# Altium PCB madiz_plate_v3_02.pcbdoc (part 2 of 2)
Units mil, origin at the board's own origin, x right, y up, seen from the top; angles counter-clockwise.
Board outline 3839.67 x 4045.62 mil, 2 copper layers (Top Layer, Bottom Layer); 68 components, 228 nets, 314 pads, 311 vias.
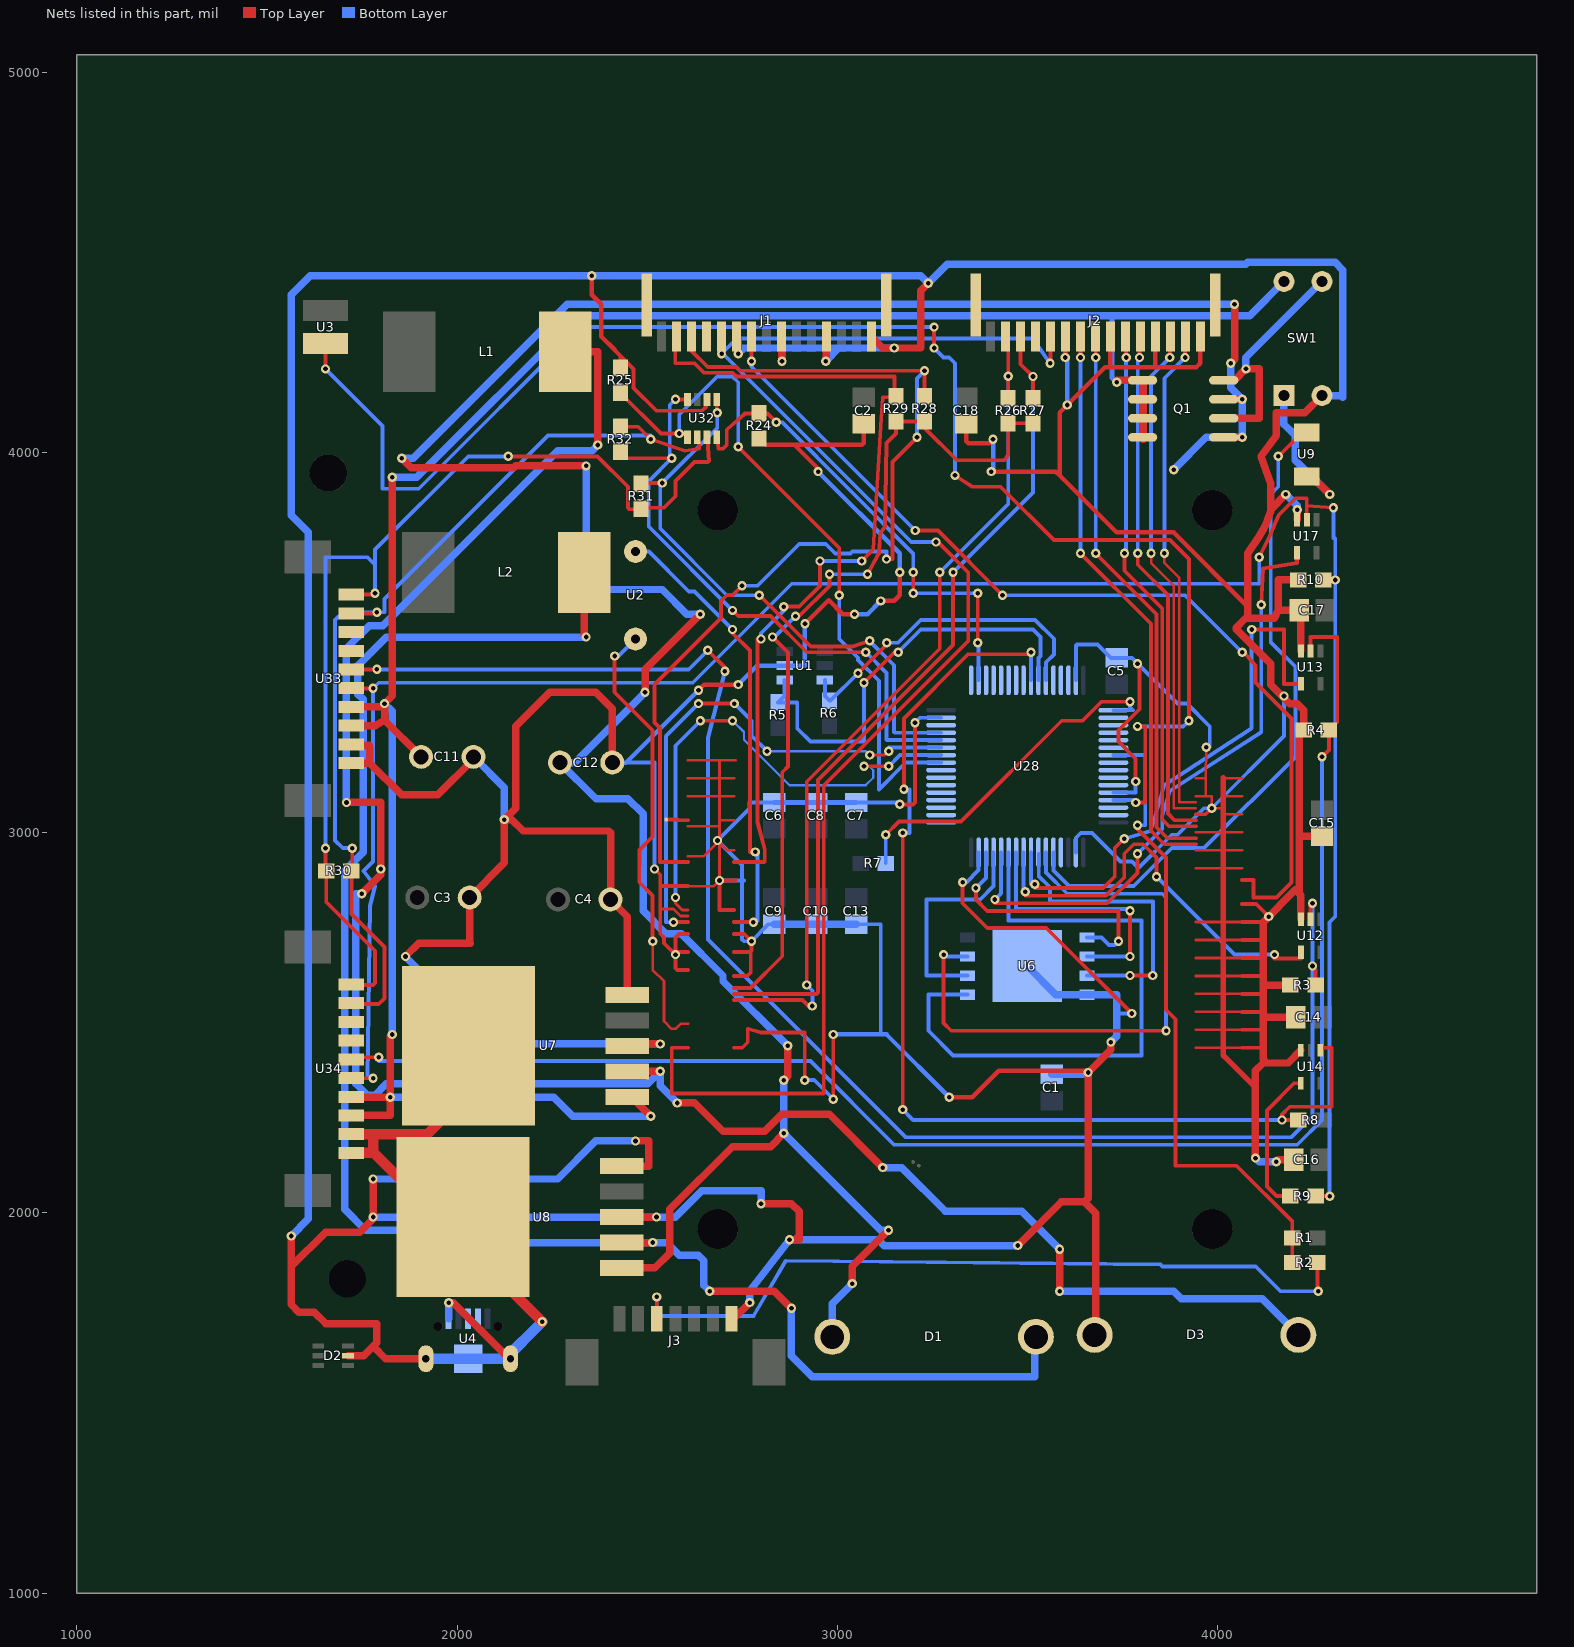
[diagram p2: the nets of this part, all layers, seen from the top]

## Via types
v1: diameter 24.41, hole 12.2, Top Layer to Bottom Layer, tented both sides, 311 vias

## Nets (pads, with @x,y where several pads share a name; then routed paths per layer and width w, separated by ;. In a path a pad name is that pad's centre, name@x,y a point inside that pad or via, vN(x,y) a via of type N, cw(c..) or ccw(c..) an arc to the next point about the centre after c; other vN are vias at no path point) (continued)
J1_9: J1.9 | length 2533.6
  Top Layer w10: v1(2774.44,4239.4) J1.9@2774.44,4304.4 ; v1(3205.03,3794.4) 3264.4,3794.4 v1(3434.4,3624.4) ; 4063.99,2875.27 4094.4,2875.27 4094.4,2829.4 4154.4,2829.4 4194.4,2869.4 4194.4,3300.02 4099.4,3395.02 4099.4,3439.4 4069.4,3474.4 v1(4064.4,3474.4)
  Bottom Layer w10: v1(2774.44,4239.4) 2774.44,4224.99 v1(3205.03,3794.4) ; v1(3434.4,3624.4) 3914.4,3624.4 v1(4064.4,3474.4)
J1_11: J1.11 J2.11 | length 4007
  Top Layer w10: 2607.31,2434.32 2564.4,2434.32 2564.4,2314.4 2964.4,2314.4 2964.4,3123.77 3344.4,3503.77 3344.4,3684.4 3264.4,3764.4 v1(3259.4,3764.4) ; v1(2695.7,4259.4) J1.11@2695.7,4304.4 ; v1(3559.4,4234.4) 3560.7,4235.7 J2.11@3560.7,4304.4
  Bottom Layer w10: v1(3259.4,3764.4) 3194.4,3764.4 2699.4,4259.4 v1(2695.7,4259.4) 2735.7,4299.4 3514.4,4299.4 3524.4,4284.4 v1(3559.4,4234.4)
J1_12: J1.12
J1_13: J1.13 R28.2 | length 2650
  Top Layer w10: 2607.31,2922.51 2533.36,2922.51 2533.36,3275.44 2519.4,3289.4 2519.4,3389.4 2694.4,3564.4 2694.4,3609.4 2709.4,3624.4 2724.4,3624.4 v1(2749.4,3649.4) ; J1.13@2616.96,4304.4 2617,4266.8 2659.4,4224.4 2734.4,4224.4 2744.4,4214.4 3224.4,4214.4 3229.4,4209.4 R28.2@3229.4,4147.4 ; v1(3129.4,3719.4) 3145,3719.4 3145,3975 v1(3209.4,4039.4)
  Bottom Layer w10: v1(2749.4,3649.4) 2790,3649.4 2900,3759.4 2969.4,3759.4 2994.4,3734.4 3034.4,3734.4 3039.4,3739.4 3129.4,3739.4 v1(3129.4,3719.4) ; v1(3209.4,4039.4) 3209.4,4194.4 v1(3229.4,4214.4)
J1_14: J1.14 R29.2 | length 2273.2
  Top Layer w10: J1.14@2573.8,4304.4 2573.8,4234.4 2624.4,4234.4 2649.4,4209.4 2725,4209.4 2735,4199.4 3150.6,4199.4 R29.2@3150.6,4147.4 ; 2728.56,2922.51 2807.51,2922.51 2809.4,2924.4 2809.4,2956.1 2790,3027 2790,3509.4 v1(2799.4,3509.4) ; v1(2859.4,3594.4) 2900,3594.4 2954.4,3648.8 v1(2954.4,3714.4) ; v1(3064.4,3714.4) 3094.4,3744.4 3114.4,4069.4 3119.4,4144.4 R29.2@3154.4,4147.4
  Bottom Layer w10: v1(2799.4,3509.4) 2799.4,3524.4 2859.4,3584.4 v1(2859.4,3594.4) ; v1(2954.4,3714.4) v1(3064.4,3714.4)
J1_G1: J1.G1
J1_G2: J1.G2
J2_2: J2.2 | length 1306.8
  Top Layer w7: v1(3860.03,3734.4) 3860.03,3709.37 3899.4,3670 3899.4,3079.99 3942.74,3079.99
  Top Layer w10: v1(3914.4,4249.4) 3914.4,4303.77 J2.2@3915.03,4304.4
  Bottom Layer w10: v1(3860.03,3734.4) 3860.03,4195.03 v1(3914.4,4249.4)
J2_3: J2.3 | length 1344.1
  Top Layer w7: v1(3825.03,3734.4) 3825.03,3709.37 3884.4,3650 3884.4,3064.24 3942.74,3064.24
  Top Layer w10: v1(3874.4,4249.4) 3874.4,4303.14 J2.3@3875.66,4304.4
  Bottom Layer w10: v1(3825.03,3734.4) 3825.03,4200.03 v1(3874.4,4249.4)
J2_5: J2.5 | length 1370.6
  Top Layer w10: v1(3790.03,3734.4) 3790.03,3704.37 3869.4,3625 3869.4,3050 3886.65,3032.75 3942.74,3032.75 ; v1(3794.4,4249.4) 3794.4,4301.88 J2.5@3796.92,4304.4
  Bottom Layer w10: v1(3790.03,3734.4) 3790.03,4245.03 v1(3794.4,4249.4)
J2_6: J2.6 | length 1411.9
  Top Layer w10: v1(3755.03,3734.4) 3755.03,3688.77 3854.4,3589.4 3854.4,3034.4 3871.8,3017 3942.74,3017 ; J2.6@3757.55,4304.4 3759.4,4302.55 v1(3759.4,4249.4)
  Bottom Layer w10: v1(3755.03,3734.4) 3759.4,3734.4 v1(3759.4,4249.4)
J2_8: J2.8 | length 1471.8
  Top Layer w10: J2.8@3678.81,4304.4 3679.4,4303.81 v1(3679.4,4249.4) ; v1(3679.4,3734.4) 3839.4,3574.4 3839.4,3014.4 3868.3,2985.5 3942.74,2985.5
  Bottom Layer w10: v1(3679.4,3734.4) v1(3679.4,4249.4)
J2_9: J2.9 | length 1509
  Top Layer w10: v1(3639.4,3734.4) 3824.4,3549.4 3824.4,3005 3859.65,2969.75 3942.74,2969.75 ; v1(3639.4,4249.4) J2.9@3639.44,4304.4 J2.9@3639.44,4304.4
  Bottom Layer w10: v1(3639.4,3734.4) v1(3639.4,4249.4)
J2_12: J2.12
J2_13: J2.13 R27.2 | length 2251.7
  Top Layer w10: 2728.56,2576.05 2946.05,2576.05 2949.4,2579.4 2949.4,3138.77 3304.4,3493.77 v1(3304.4,3684.4) ; J2.13@3481.96,4304.4 3481.96,4231.84 v1(3514.4,4199.4) R27.2@3514.4,4142.4
  Bottom Layer w10: v1(3304.4,3684.4) 3514.4,3894.4 v1(3514.4,4199.4)
J2_14: J2.14 R26.2 | length 2260.1
  Top Layer w10: 2728.56,2560.31 2908.49,2560.31 2924.4,2544.4 v1(2934.4,2544.4) ; v1(2919.4,2599.4) 2919.4,3133.8 3269.4,3483.8 v1(3269.4,3684.4) ; J2.14@3442.59,4304.4 3449.4,4297.59 v1(3449.4,4199.87) R26.2@3449.4,4142.4
  Bottom Layer w10: v1(2919.4,2599.4) 2934.4,2584.4 v1(2934.4,2544.4) ; v1(3269.4,3684.4) 3449.4,3864.4 v1@3449.4,4201.46
J2_G1: J2.G1
J2_G2: J2.G2
MOSFET_PIN: U9.2 U28.21 | length 1767.9
  Top Layer w10: v1(4159.4,3989.4) 4222.62,4052.62 U9.2@4234.4,4052.62
  Bottom Layer w10: U28.21@3568.3,2948.03 3568.3,2900.5 3609.4,2859.4 3779.4,2859.4 3879.4,2959.4 3964.4,2959.4 4204.4,3199.4 4204.4,3436.4 4139.4,3501.4 4139.4,3889.4 4159.4,3909.4 v1(4159.4,3989.4)
POWER+: C11.1 Q1.5 Q1.6 Q1.7 Q1.8 SW1.4 U7.1 U33.7 U33.8 U34.7 U34.8 | length 6226.8
  Top Layer w19.68: U34.8@1721.48,2256.37 1824.4,2256.4 v1(1824.4,2304.4) ; U34.7@1721.48,2305.58 1721.5,2304.4 v1(1824.4,2304.4) ; U33.8@1721.48,3281.37 1784.4,3281.37 1809.4,3295.49 ; U33.7@1721.48,3330.58 1800.58,3330.58 v1(1809.4,3339.4) ; 1825.03,2374.4 1824.4,2373.77 v1(1824.4,2304.4) ; v1(1829.4,2469.4) 1824.4,2464.4 v1(1824.4,2304.4) ; 1829.4,3414.4 v1(1829.4,3934.4) 1829.4,3914.4 ; 1829.4,3534.4 1829.4,3359.4 v1(1809.4,3339.4) ; C11.1@1905.5,3199.4 1809.4,3295.49 ; U7.1@2448.16,2305.4 2458.4,2305.4 v1(2509.4,2254.4) ; v1(3734.4,4184.4) 3734.4,4189.4 Q1.5@3802.9,4189.4 ; Q1.8@3804.4,4034.4 Q1.7@3804.4,4084.4 ; Q1.7@3804.4,4089.4 3804.4,4139.4 Q1.5@3804.4,4189.4 ; 1809.4,3295.49 v1(1809.4,3339.4)
  Bottom Layer w13.78: 3722.25,4359.4 3722.25,4196.55 v1(3734.4,4184.4)
  Bottom Layer w19.68: v1(1809.4,3339.4) 1829.4,3319.4 v1(1829.4,2469.4) ; v1(1824.4,2304.4) 2254.4,2304.4 2304.4,2254.4 v1(2509.4,2254.4) ; v1(1829.4,3934.4) 1894.4,3934.4 2319.4,4359.4 4084.4,4359.4 SW1.4@4174.4,4449.4
POWER-: C1.2 C2.1 C3.2 C4.2 C5.2 C6.2 C7.2 C8.2 C9.2 C10.2 C11.2 C12.2 C13.2 C14.1 C15.1 C16.1 C17.2 C18.1 D2.2 D3.2 J1.1 J1.4 J1.7 J1.10 J2.1 J2.4 J2.7 J2.10 J3.7 pad.10 R3.2 R4.2 R10.1 R24.1 R25.1 SW1.2 U1.2 U4.5 U4.6 U4.7 U6.4 U6.9 U7.3 U7.5 U7.6 U8.3 U8.5 U8.6 U12.3 U13.3 U14.3 U17.3 U28.12 U28.18 U28.31 U28.47 U28.63 U32.2 U33.9 U33.10 U34.9 U34.10 | length 38405.4
  Top Layer w7: 2534.4,2799.2 2569.2,2799.2 2587.62,2780.78 2607.31,2780.78 ; 2607.31,2859.52 2675.15,2859.52 v1(2690.03,2874.4) 2690.03,2974.4 v1(2685.03,2979.4) 2685.03,2974.4 2648.89,2938.26 2607.31,2938.26 ; 2607.31,3017 2690,3017 ; 2607.31,3095.74 2690,3095.74 2728.56,3095.74 ; 2607.31,3142.98 2690,3142.98 2728.56,3142.98 ; 2607.31,3190.23 2690,3190.23 ; 2690,3032.75 2728.56,3032.75 ; 2728.56,2954.01 2710.39,2954.01 v1(2685.03,2979.4) 2690,2984.4 2690,3190.2 2732.3,3190.2 ; 3942.74,2434.32 4015.02,2434.32 ; 3942.74,2481.57 4015.02,2481.57 ; 3942.74,2528.81 4015.02,2528.81 ; 3942.74,2576.05 4015.02,2576.05 ; 3942.74,2623.3 4015.02,2623.3 ; 3942.74,2670.54 4015.02,2670.54 ; 3942.74,2717.79 4015.02,2717.79 ; 3942.74,2765.03 4015.02,2765.03 ; 3942.74,2906.76 4015.02,2906.76 ; 3942.74,2954.01 4015.02,2954.01 ; 3942.74,3001.25 4014.75,3001.25 4015,3001.5 4015.25,3001.25 4063.99,3001.25 ; 3942.74,3095.74 3968.6,3095.74 3968.6,3143 ; 3942.74,3142.98 3968.58,3142.98 ; 3968.6,3095.7 3984.4,3095.7 v1(3984.4,3064.4) 4015.03,3064.4 4015.03,3065.97 ; v1(3970.03,3224.4) 3968.6,3143 ; 4015,3049 4015.51,3048.49 4063.99,3048.49 ; 4015,3096.5 4015.76,3095.74 4063.99,3095.74 ; 4063.99,2434.32 4015.02,2434.32 ; 4063.99,2481.57 4015.02,2481.57 ; 4063.99,2528.81 4015.02,2528.81 ; 4063.99,2576.05 4015.02,2576.05 ; 4063.99,2623.3 4015.02,2623.3 ; 4063.99,2670.54 4015.02,2670.54 ; 4063.99,2717.79 4015.02,2717.79 ; 4063.99,2765.03 4015.02,2765.03 ; 4063.99,2906.76 4015.02,2906.76 ; 4063.99,2954.01 4015.02,2954.01 ; 4063.99,3142.98 4020.02,3142.98 4020.02,3144.4 4015.02,3144.4 4015.02,2979.4 4015.02,2954.01 ; 4015.02,2434.32 4015.02,2481.57 ; 4015.02,2481.57 4015.02,2528.81 ; 4015.02,2528.81 4015.02,2579.24 4015.02,2576.05 ; 4015.02,2576.05 4015.02,2623.3 ; 4015.02,2623.3 4015.02,2670.54 ; 4015.02,2670.54 4015.02,2717.79 ; 4015.02,2717.79 4015.02,2765.03 ; 4015.02,2765.03 4015.02,2906.76 ; 4015.02,2906.76 4015.02,2954.01
  Top Layer w10: R25.1@2429.4,4222.4 2429.4,4254.4 2414.4,4269.4 2464.4,4219.4 2464.4,4169.4 2524.4,4109.4 2644.4,4109.4 2654.4,4119.4 2654.4,4136.2 U32.2@2657.19,4139.01 ; v1(2519.4,2904.4) 2534.4,2889.4 2534.4,2859.4 ; 2607.31,2639.05 2579.75,2639.05 2574.4,2644.4 v1(2574.4,2679.4) ; 2607.31,2686.29 2581.29,2686.29 v1(2574.4,2679.4) ; 2607.31,2733.53 2583.53,2733.53 2574.4,2724.4 v1(2574.4,2679.4) ; 2607.31,2859.52 2607.19,2859.4 2534.4,2859.4 ; 2728.56,2434.32 2749.94,2434.32 2764.4,2448.77 2764.4,2484.4 2799.4,2474.4 2914.4,2474.4 v1(2914.4,2349.4) ; 2728.56,2623.3 2763.3,2623.3 2772.51,2632.51 2772.51,2686.29 ; 2728.56,2686.29 2771.29,2686.29 2774.4,2689.4 v1(2774.4,2714.4) 2755.27,2733.53 2728.56,2733.53 ; 2728.56,2796.53 2690.03,2796.53 v1(2690.03,2874.4) 2732.3,2874.4 2732.3,2875.3 ; v1(2989.4,2299.4) v1(2989.4,2469.4) ; v1(3164.4,3074.4) 3199.4,3074.4 3204.4,3079.4 v1(3204.4,3289.4) ; v1(3329.4,2869.4) 3329.4,2814.4 3394.4,2749.4 3549.4,2749.4 v1(3774.4,2524.4) ; v1(3784.4,3134.4) 3784.4,3194.4 3739.4,3239.4 3739.4,3269.4 3794.4,3324.4 3794.4,3444.4 v1(3789.4,3444.4) ; 3942.74,3048.49 3968.49,3048.49 v1(3984.4,3064.4) ; 4063.99,2434.32 4118.11,2434.32 4119.4,2435.6 ; 4063.99,2481.57 4119.4,2481.57 ; 4063.99,2528.81 4118.31,2528.81 4119.4,2529.9 ; 4063.99,2576.05 4119.4,2576.05 ; 4063.99,2623.3 4119.4,2623.3 ; 4063.99,2670.54 4119.4,2670.54 ; 4063.99,2717.79 4119.4,2717.79 ; 4063.99,2765.03 4120.03,2765.03 v1(4134.4,2779.4) 4101.53,2812.27 4063.99,2812.27 ; v1@4163.66,3359.4 v1(4174.4,3359.4) ; 2534.4,2859.4 2534.4,2734.4 2544.4,2724.4 2544.4,2709.4 v1(2574.4,2679.4)
  Top Layer w11.81: v1(2354.4,4464.4) 2354.4,4414.4 2379.4,4389.4 2379.4,4304.4 2414.4,4269.4 ; v1(2635.03,3374.4) 2650.03,3389.4 v1(2739.4,3389.4) ; R24.1@2794.4,4036.4 2811.4,4019.4 3064.4,4019.4 3069.4,4024.4 C2.1@3069.4,4075.46 ; 2887.55,4019.4 2949.4,3957.55 v1(2949.4,3949.4) ; v1(2915.03,3549.4) 2977.21,3611.58 3014.4,3574.4 v1(3045.03,3574.4) ; v1(3114.4,3609.4) 3149.4,3609.4 3164.4,3624.4 v1(3164.4,3684.4) ; v1(3294.4,2304.4) 3354.4,2304.4 3424.4,2374.4 3654.4,2374.4 v1(3659.4,2369.4) ; C18.1@3339.4,4075.46 3339.4,4029.4 3344.4,4024.4 3399.4,4024.4 v1(3409.4,4034.4) ; v1(3404.4,3949.4) 3574.4,3949.4 3584.4,3939.4 ; v1(3599.4,4249.4) 3599.4,4303.73 J2.10@3600.07,4304.4 ; 3717.7,4224.4 J2.7@3718.18,4304.4 ; J2.4@3836.29,4304.4 3836.29,4227.51 3839.4,4224.4 ; J2.1@3954.4,4304.4 3954.4,4234.4 3944.4,4224.4 3839.4,4224.4 ; 4079.4,3564.4 4079.4,3594.4 3884.4,3789.4 3734.4,3789.4 3584.4,3939.4 ; 3584.4,3939.4 3584.4,4104.4 v1(3604.4,4124.4) 3704.4,4224.4 3839.4,4224.4
  Top Layer w15: 4015.03,3144.4 4015.03,2414 4099.4,2329.63
  Top Layer w19.68: v1(1564.4,1939.4) 1564.4,1859.4 ; D2.2@1713.38,1624.4 1754.4,1624.4 1779.4,1649.4 ; U33.10@1721.48,3182.95 1770.9,3182.9 1854.4,3099.4 1949.4,3099.4 2043.3,3193.3 C11.2@2043.3,3199.4 ; U33.9@1721.48,3232.16 1724.24,3229.4 1769.4,3229.4 1770.85,3220.85 1770.85,3182.95 ; v1(1779.4,2089.4) v1(1779.4,1989.4) 1779.4,1984.4 1744.4,1949.4 1654.4,1949.4 1564.4,1859.4 ; v1(1864.4,2674.4) 1899.4,2709.4 2034.4,2709.4 2033.3,2710.5 C3.2@2033.3,2829.4 2124.4,2920.49 v1(2124.4,3034.4) ; U4.6@1918.22,1616.76 1812.04,1616.76 1779.4,1649.4 ; v1(1978.21,1763.63) 1990.17,1763.63 2137.06,1616.74 U4.7@2140.62,1616.74 ; C12.2@2408.3,3184.4 2408.3,3325.5 2364.4,3369.4 2244.4,3369.4 2154.4,3279.4 2154.4,3064.4 v1(2124.4,3034.4) ; U8.3@2433.16,1989.4 v1(2524.4,1989.4) ; U8.5@2433.16,2123.4 2504.4,2123.4 2504.4,2189.4 v1(2469.4,2189.4) ; U7.3@2448.16,2439.4 2453.16,2444.4 v1(2534.4,2444.4) ; U7.5@2448.16,2573.4 2448.16,2779.53 C4.2@2403.3,2824.4 2404.4,2825.49 2404.4,2999.4 2399.4,3004.4 2174.4,3004.4 2144.4,3034.4 v1(2124.4,3034.4) ; J3.7@2722.04,1721.48 2726.48,1721.48 v1(2769.4,1764.4) ; J1.10@2735.07,4304.4 2739.4,4300.07 v1(2739.4,4259.4) ; v1(2799.4,2024.4) 2879.4,2024.4 2899.4,2004.4 2899.4,1934.4 ; J1.7@2853.18,4304.4 2854.4,4303.18 v1(2854.4,4239.4) ; v1(2874.4,1929.4) 2899.4,1929.4 2899.4,1934.4 ; v1(2969.4,4239.4) 2971.29,4241.29 J1.4@2971.29,4304.4 ; J1.1@3089.4,4304.4 3119.4,4274.4 v1(3149.4,4274.4) 3219.4,4274.4 3219.4,4424.4 v1(3239.4,4444.4) ; v1(3474.4,1914.4) 3589.4,2029.4 3649.4,2029.4 ; D3.2@3676.68,1679.4 3679.4,1682.14 3679.4,1999.4 3649.4,2029.4 ; v1(3719.4,2449.4) 3719.4,2429.4 v1(3659.4,2369.4) 3659.4,2039.4 3649.4,2029.4 ; v1(4099.4,2144.4) 4099.4,2374.4 4119.4,2394.4 4129.4,2394.4 ; 4119.4,2599.4 R3.2@4191.4,2599.4 ; v1(4154.4,2134.4) 4159.4,2139.4 C16.1@4200.46,2139.4 ; v1(4179.4,3889.4) 4139.4,3849.4 4139.4,3844.4 ; 4204.4,2849.4 4119.4,2764.4 4119.4,2509.4 ; C14.1@4205.46,2514.4 4124.4,2514.4 4119.4,2509.4 ; U17.3@4208.81,3822.71 4208.81,3848.81 v1(4209.4,3849.4) ; R10.1@4211.4,3664.4 4159.4,3664.4 4159.4,3584.4 ; U14.3@4218.81,2427.7 4185.5,2394.4 4129.4,2394.4 ; U12.3@4218.81,2772.71 4218.8,2835 4214.4,2839.4 4214.4,2984.4 ; U13.3@4218.81,3477.71 4218.81,3580.03 C17.2@4214.44,3584.4 4169.4,3584.4 4159.4,3584.4 ; C15.1@4274.4,2990.46 4220.46,2990.46 4214.4,2984.4 ; SW1.2@4274.4,4149.4 4229.4,4104.4 4154.4,4104.4 4154.4,4044.4 4114.4,3989.4 4139.4,3919.4 4139.4,3864.4 4139.4,3844.4 ; 1564.4,1859.4 1564.4,1759.4 1584.4,1739.4 1624.4,1739.4 1654.4,1709.4 1789.4,1709.4 1789.4,1659.4 1779.4,1649.4 ; 2899.4,1934.4 2894.4,1934.4 2899.4,1934.4 ; 4079.4,3564.4 4074.4,3564.4 4049.4,3539.4 4049.4,3534.4 4139.4,3444.4 4139.4,3389.4 4189.4,3339.4 4209.4,3339.4 4226.4,3322.4 R4.2@4226.4,3269.4 4214.4,3257.4 4214.4,2984.4 ; 4079.4,3564.4 4079.4,3734.4 4109.4,3779.4 4124.4,3804.4 4139.4,3844.4 ; 4079.4,3564.4 4149.4,3564.4 4159.4,3584.4 ; 4119.4,2509.4 4119.4,2404.4 4129.4,2394.4
  Top Layer w27.56: U34.10@1721.48,2157.95 1777.95,2157.95 1779.4,2159.4 ; U34.9@1721.48,2207.16 1779.4,2207.16 ; U7.6@2030.64,2439.4 2030.64,2315.64 1922.16,2207.16 1779.4,2207.16 ; v1(2224.4,1714.4) 2015.64,1923.16 U8.6@2015.64,1989.4 1949.4,1989.4 1779.4,2159.4 ; 1779.4,2159.4 1779.4,2207.16
  Bottom Layer w10: C12.2@2408.3,3184.4 2519.4,3184.4 v1(2519.4,2904.4) ; v1(2690.03,2874.4) 2754.42,2874.4 2755.02,2875 ; C9.2@2834.4,2759.44 2819.44,2759.44 v1(2774.4,2714.4) 2754.4,2714.4 2749.4,2719.4 2749.4,2915.03 v1(2685.03,2979.4) 2769.4,3063.77 2769.4,3079.4 C6.2@2834.4,3079.36 ; v1(2914.4,2349.4) 2939.4,2349.4 v1(2989.4,2299.4) ; v1(2989.4,2469.4) 3114.4,2469.4 3114.4,2759.4 C13.2@3049.4,2759.44 ; C7.2@3049.4,3079.36 3159.44,3079.36 v1(3164.4,3074.4) ; v1(3204.4,3289.4) 3217.35,3302.35 U28.47@3273.03,3302.35 ; v1(3329.4,2869.4) 3339.4,2869.4 3371.5,2901.5 U28.31@3371.5,2948 ; U28.18@3627.35,2948.03 3627.3,2986.7 3640,2999.4 3669.4,2999.4 3744.4,2924.4 3774.4,2924.4 3789.4,2909.4 3794.4,2909.4 3879.4,2994.4 3894.4,2994.4 3964.4,3064.4 v1(3984.4,3064.4) 4174.4,3254.4 v1(4174.4,3359.4) ; U28.63@3627.35,3400.77 3627.35,3492.35 3629.4,3494.4 3684.4,3494.4 3719.44,3459.36 C5.2@3734.4,3459.36 3774.44,3459.36 v1(3789.4,3444.4) 3894.4,3339.4 3919.4,3339.4 3979.4,3279.4 3979.4,3224.4 v1(3970.03,3224.4) ; U28.12@3725.77,3105.5 3784.4,3105.5 v1(3784.4,3134.4) ; 3734.4,2524.4 v1(3774.4,2524.4)
  Bottom Layer w11.81: C12.2@2408.3,3184.4 2445.02,3184.39 v1(2635.03,3374.4) ; v1(2739.4,3389.4) 2789.4,3439.4 U1.2@2861.25,3439.4 2914.4,3439.4 2914.4,3548.77 v1(2915.03,3549.4) ; v1(2949.4,3949.4) 3164.4,3734.4 v1(3164.4,3684.4) ; v1(2989.4,2469.4) 3129.4,2469.4 v1(3294.4,2304.4) ; v1(3045.03,3574.4) 3079.4,3574.4 v1(3114.4,3609.4) ; v1(3404.4,3949.4) 3409.4,3954.4 v1(3409.4,4034.4) ; v1(3599.4,4249.4) 3604.4,4244.4 v1(3604.4,4124.4)
  Bottom Layer w13.78: C6.2@2834.4,3079.36 C8.2@2944.4,3079.36 C7.2@3049.4,3079.36
  Bottom Layer w19.68: v1(1564.4,1939.4) 1609.4,1984.4 1609.4,3789.4 1564.4,3834.4 1564.4,4414.4 1614.4,4464.4 3219.4,4464.4 v1(3239.4,4444.4) 3289.4,4494.4 4074.4,4494.4 4079.4,4499.4 4309.4,4499.4 4329.4,4479.4 4329.4,4144.4 4324.41,4149.39 SW1.2@4274.4,4149.4 ; v1(1779.4,1989.4) v1(2524.4,1989.4) 2574.4,1989.4 2579.4,1994.4 2643.66,2058.66 2799.4,2058.66 v1(2799.4,2024.4) ; v1(1779.4,2089.4) 2264.4,2089.4 2364.4,2189.4 v1(2469.4,2189.4) ; v1(1864.4,2674.4) 2094.4,2444.4 v1(2534.4,2444.4) ; U4.5@1978.21,1722.06 v1(1978.21,1763.63) ; C11.2@2043.3,3199.4 2124.4,3118.29 v1(2124.4,3034.4) ; v1(2739.4,4259.4) 2749.4,4269.4 2749.4,4274.4 v1(3149.4,4274.4) 3004.4,4274.4 v1(2969.4,4239.4) ; v1(2769.4,1764.4) 2769.4,1794.4 v1(2874.4,1929.4) 3064.4,1929.4 3108.48,1929.4 3123.48,1914.4 v1(3474.4,1914.4) ; C9.2@2834.4,2759.44 C10.2@2944.4,2759.44 C13.2@3049.4,2759.44 ; 2853.6,4274.4 v1(2854.4,4239.4) ; U6.9@3499.4,2649.4 3574.4,2574.4 U6.4@3656.88,2574.4 3734.4,2574.4 3734.4,2464.4 v1(3719.4,2449.4) ; C1.2@3564.4,2364.36 3654.36,2364.36 v1(3659.4,2369.4) ; v1(4099.4,2144.4) 4109.4,2134.4 v1(4154.4,2134.4) ; v1(4179.4,3889.4) 4209.4,3859.4 v1(4209.4,3849.4)
  Bottom Layer w27.56: U4.6@1918.22,1616.76 U4.7@2029.4,1616.74 ; U4.7@2029.4,1616.74 2140.62,1616.74 2140.62,1630.62 pad.10@2208.82,1698.82 v1(2224.4,1714.4)
Q1_1: C12.1 D1.2 Q1.1 Q1.3 U8.1 | length 7413.3
  Top Layer w19.68: v1(1854.4,3984.4) 1879.4,3959.4 1889.4,3959.4 2149.14,3959.4 2154.14,3964.4 v1(2339.4,3964.4) ; U8.1@2433.16,1855.4 2520.4,1855.4 2559.4,1894.4 2559.4,2009.4 2724.4,2174.4 2824.4,2174.4 v1(2859.4,2209.4) ; v1(2494.4,3369.4) 2494.4,3429.4 v1(2639.4,3574.4) ; v1(2859.4,2349.4) 2869.4,2359.4 v1(2869.4,2439.4) ; v1(3039.4,1814.4) 3039.4,1859.4 v1(3134.4,1954.4) ; Q1.1@4015.9,4039.4 v1(4064.4,4039.4) ; Q1.3@4015.9,4139.4 v1(4064.4,4139.4) ; v1(4034.4,4234.4) 4044.4,4244.4 v1(4044.4,4389.4)
  Bottom Layer w19.68: v1(1854.4,3984.4) 1884.4,3984.4 2289.4,4389.4 v1(4044.4,4389.4) ; v1(2339.4,3964.4) 2339.4,3639.4 2539.4,3639.4 2604.4,3574.4 v1(2639.4,3574.4) ; v1(2494.4,3369.4) 2309.39,3184.39 C12.1@2270.5,3184.4 2365.5,3089.4 2449.4,3089.4 2489.4,3049.4 2489.4,2794.4 2549.4,2734.4 2589.4,2734.4 2699.4,2624.4 2699.4,2609.4 v1(2869.4,2439.4) ; v1(2859.4,2349.4) v1(2859.4,2209.4) 3114.4,1954.4 v1(3134.4,1954.4) ; D1.2@2986.68,1674.4 2986.67,1761.67 v1(3039.4,1814.4) ; v1(3884.4,3954.4) 3969.4,4039.4 v1(4064.4,4039.4) v1(4064.4,4139.4) 4034.4,4169.4 v1(4034.4,4234.4)
R1_1: R1.1 R2.2 U28.7 | length 1700.4
  Top Layer w10: v1(3789.4,3019.4) 3789.4,3010 3864.4,2935 3864.4,2534.4 3889.4,2509.4 3889.4,2124.4 4049.4,2124.4 4196.4,1977.4 R1.1@4196.4,1934.4 R2.2@4196.4,1869.4
  Bottom Layer w10: U28.7@3725.77,3203.93 3809.4,3203.9 3809.4,3019.4 v1(3789.4,3019.4)
R2_1: J3.3 R2.1 | length 2035.1
  Top Layer w10: J3.3@2525.19,1721.48 v1(2525.19,1779.4) ; R2.1@4262.4,1869.4 4262.4,1796.4 v1(4264.4,1794.4)
  Bottom Layer w10: v1(2525.19,1779.4) 2525.2,1729.4 2779.4,1729.4 2864.4,1874.4 3849.4,1864.4 3854.4,1859.4 4100,1859.4 4165,1794.4 v1(4264.4,1794.4)
R3_1: R3.1 U12.2 U33.5 | length 4267.4
  Top Layer w10: U33.5@1721.48,3429.01 1721.87,3429.4 v1(1789.4,3429.4) ; v1(2659.4,3479.4) 2704.4,3434.4 v1(2704.4,3424.4) ; U12.2@4244.4,2772.71 4244.4,2809.4 v1(4249.4,2814.4) ; v1(4249.4,2649.4) 4249.4,2646.83 4257.4,2638.83 ; 4257.4,2638.83 R3.1@4257.4,2599.4 4257.4,2638.83
  Bottom Layer w10: v1(1789.4,3429.4) 2609.4,3429.4 v1(2659.4,3479.4) ; v1(2704.4,3424.4) 2660,3249.4 2660,2718.8 3179.4,2199.4 4194.4,2199.4 4249.4,2254.4 v1(4249.4,2814.4)
R4_1: R4.1 U13.2 U34.5 | length 4076.5
  Top Layer w10: U34.5@1721.48,2404.01 1726.87,2409.4 v1(1794.4,2409.4) ; U13.2@4244.4,3477.71 4244.4,3514.4 4314.4,3514.4 4314.4,3291.4 R4.1@4292.4,3269.4 4292.4,3217.4 v1(4274.4,3199.4)
  Bottom Layer w10: v1(1794.4,2409.4) 1794.4,2399.4 2929.4,2399.4 3149.4,2179.4 4209.4,2179.4 4274.4,2244.4 v1(4274.4,3199.4)
R8_2: R8.2 U14.1 U28.57 | length 2941.9
  Top Layer w10: v1(3171.9,2271.9) v1(3171.9,2999.4) ; v1(3175.03,3114.4) 3175,3300 3344.4,3469.4 3509.4,3469.4 v1(3509.4,3474.4) ; R8.2@4211.4,2244.4 v1(4169.4,2244.4) 4169.4,2259.4 4189.4,2279.4 4299.4,2279.4 4299.4,2434.4 4270,2434.4 U14.1@4269.99,2427.7
  Bottom Layer w10: v1@3169.4,2274.4 3199.4,2244.4 v1(4169.4,2244.4) ; v1(3171.9,2999.4) 3189.4,2999.4 3189.4,3114.4 v1(3175.03,3114.4) ; U28.57@3509.24,3400.77 v1(3509.4,3474.4)
R9_1: R9.1 R10.2 U17.2 U33.6 U34.6 | length 5962.9
  Top Layer w10: U34.6@1721.48,2354.8 1721.88,2354.4 v1(1779.4,2354.4) ; U33.6@1721.48,3379.8 1721.88,3379.4 v1(1779.4,3379.4) ; v1(4109.4,3724.4) 4134.4,3774.4 4160.6,3835.6 4204.4,3879.4 4234.4,3879.4 U17.2@4234.4,3822.71 4234.4,3859.4 v1(4304.4,3854.4) ; R9.1@4257.4,2044.4 v1(4294.4,2044.4) ; R10.2@4277.4,3664.4 v1(4309.4,3664.4)
  Bottom Layer w10: v1@1774.4,3376.9 1779.4,3376.9 1779.4,2924.4 1754.4,2899.4 1784.4,2859.4 1771,2807.6 1764.4,2354.4 v1(1779.4,2354.4) ; v1(1779.4,3379.4) 1794.4,3394.4 2620,3394.4 2880,3654.4 4109.4,3654.4 v1(4109.4,3724.4) ; v1(4294.4,2044.4) 4294.4,2764.4 4309.4,2779.4 4309.4,3774.4 4304.4,3774.4 v1(4304.4,3854.4)
R9_2: R9.2 U14.4 | length 391.5
  Top Layer w10: R9.2@4191.4,2044.4 4154.4,2044.4 4129.4,2069.4 4129.4,2269.4 4201.1,2341.1 U14.4@4218.81,2341.09
R24_2: R24.2 U28.50 U32.8 | length 1270.2
  Top Layer w10: U32.8@2682.8,4049.8 2687.8,4009.4 2699.4,4009.4 2709.4,4019.4 2709.4,4059.4 2754.4,4099.4 2756.4,4102.4 R24.2@2794.4,4102.4 2816.4,4102.4 v1(2839.4,4079.4) ; v1(3199.4,3629.4) v1(3199.4,3684.4) ; v1(3369.4,3499.4) v1(3369.4,3629.4)
  Bottom Layer w10: v1(2839.4,4079.4) 2854.4,4079.4 3039.4,3894.4 3199.4,3734.4 v1(3199.4,3684.4) ; v1(3199.4,3629.4) v1(3369.4,3629.4) ; v1(3369.4,3499.4) 3371.45,3497.35 U28.50@3371.45,3400.77
R25_2: R25.2 U28.41 U32.5 | length 1890.2
  Top Layer w10: R25.2@2429.4,4156.4 2536.4,4049.4 v1(2584.4,4049.4) U32.5@2606,4049.8 ; v1(2739.4,4014.4) 3005.03,3748.77 v1(3005.03,3624.4)
  Bottom Layer w10: v1(2584.4,4049.4) 2584.4,4099.4 2684.4,4199.4 2724.4,4199.4 2739.4,4184.4 v1(2739.4,4014.4) ; v1(3005.03,3624.4) 3005,3509.4 3054.4,3460 3054.4,3454.4 3109.4,3399.4 3109.4,3113.8 3179.8,3184.2 U28.41@3273.03,3184.24
S$1126: 
SW1_1: SW1.1 U9.1 | length 389.1
  Top Layer w19.68: U9.1@4234.4,3936.18 4247.62,3936.18 v1(4294.4,3889.4)
  Bottom Layer w19.68: SW1.1@4174.4,4149.4 4174.4,4074.4 4204.4,4044.4 4204.4,3979.4 v1(4294.4,3889.4)
SW1_3: Q1.2 Q1.4 SW1.3 | length 642.3
  Top Layer w19.68: Q1.2@4015.9,4089.4 4109.4,4089.4 4109.4,4219.4 v1(4074.4,4219.4) 4044.4,4189.4 Q1.4@4015.9,4189.4
  Bottom Layer w19.68: v1(4074.4,4219.4) 4074.4,4249.4 SW1.3@4274.4,4449.4
U4_2: U4.2
U4_3: U4.3
U6_1: U6.1 U28.30 | length 697.1
  Top Layer w10: v1(3364.4,2854.4) 3364.4,2824.4 3394.4,2794.4 3739.4,2794.4 v1(3739.4,2714.4)
  Bottom Layer w10: v1(3364.4,2854.4) 3391.13,2881.13 U28.30@3391.13,2948.03 ; U6.1@3656.88,2724.4 3694.4,2724.4 3714.4,2704.4 3729.4,2704.4 v1(3739.4,2714.4)
U6_2: U6.2 U28.26 | length 690.6
  Top Layer w10: v1@3769.4,2671.9 v1(3769.4,2794.4) v1@3769.4,2796.9
  Bottom Layer w10: U28.26@3469.87,2948.03 3469.9,2799.4 3769.4,2799.4 v1(3769.4,2794.4) ; U6.2@3656.88,2674.4 v1(3769.4,2674.4)
U6_3: U6.3 U28.23 | length 779
  Top Layer w10: v1(3769.4,2624.4) v1(3829.4,2624.4)
  Bottom Layer w10: U28.23@3529.4,2944.4 3529.4,2886.3 3559.4,2856.3 3559.4,2819.4 3829.9,2819.4 v1@3829.9,2620.8 ; U6.3@3656.88,2624.4 v1(3769.4,2624.4)
U6_5: U6.5 U28.27 | length 1667.2
  Bottom Layer w10: U6.5@3341.92,2574.4 3239.4,2574.4 3239.4,2479.4 3304.4,2414.4 3799.4,2414.4 3799.4,2769.4 3450.2,2769.4 U28.27@3450.19,2948.03
U6_6: U6.6 U28.29 | length 587
  Bottom Layer w10: U6.6@3341.92,2624.4 3234.4,2624.4 3234.4,2824.4 3375.8,2824.4 3410.8,2859.4 U28.29@3410.82,2948.03
U6_7: U6.7 U28.22 | length 1583.7
  Top Layer w10: v1(3279.4,2679.4) 3279.4,2499.4 3299.4,2479.4 v1(3864.4,2479.4)
  Bottom Layer w10: v1(3279.4,2679.4) 3284.4,2674.4 U6.7@3341.92,2674.4 ; U28.22@3548.61,2948.03 3548.6,2895.2 3604.4,2839.4 3854.4,2839.4 3864.4,2829.4 v1(3864.4,2479.4)
U7_2: D3.1 L1.2 U7.2 | length 5497.3
  Top Layer w19.68: v1(1709.4,3079.4) 1799.4,3079.4 v1(1799.4,2904.4) 1799.4,2889.4 v1(1749.4,2839.4) ; L1.2@2284.12,4264.4 2370,4264.4 v1(2370.03,4019.4) ; U7.2@2448.16,2372.4 v1(2534.4,2372.4) ; v1(2579.4,2289.4) 2624.4,2289.4 2699.4,2214.4 2809.4,2214.4 2854.4,2259.4 2979.4,2259.4 v1(3119.4,2119.4) ; v1(3584.4,1794.4) v1(3584.4,1904.4)
  Bottom Layer w19.68: v1(1709.4,3079.4) 1709.4,3484.4 1769.4,3544.4 1804.4,3544.4 2264.4,4004.4 2355.03,4004.4 v1(2370.03,4019.4) ; v1(1749.4,2839.4) 1734.4,2839.4 1734.4,2339.4 1764.4,2309.4 1784.4,2309.4 1814.4,2339.4 2501.4,2339.4 v1(2534.4,2372.4) 2534.4,2334.4 v1(2579.4,2289.4) ; v1(3119.4,2119.4) 3169.4,2119.4 3284.4,2004.4 3484.4,2004.4 v1(3584.4,1904.4) ; v1(3584.4,1794.4) 3884.4,1794.4 3904.4,1774.4 4117.1,1774.4 D3.1@4212.12,1679.4
U8_2: D1.1 L2.2 U8.2 | length 4555.4
  Top Layer w19.68: L2.2@2334.12,3684.4 2334.12,3519.68 v1(2339.4,3514.4) ; U8.2@2433.16,1922.4 v1(2514.4,1922.4) ; v1(2664.4,1794.4) 2834.4,1794.4 v1(2879.4,1749.4)
  Bottom Layer w19.68: v1(2339.4,3514.4) 1814.4,3514.4 1739.4,3439.4 1739.4,3364.4 1753.5,3350.3 1753.5,2948.5 1704.4,2899.4 1704.4,2009.4 1759.4,1954.4 1879.4,1954.4 1911.4,1922.4 v1(2514.4,1922.4) 2551.4,1922.4 2584.4,1889.4 2634.4,1889.4 2649.4,1874.4 2649.4,1809.4 v1(2664.4,1794.4) ; v1(2879.4,1749.4) 2879.4,1624.4 2934.4,1569.4 3519.4,1569.4 3519.4,1671.7 D1.1@3522.12,1674.4
U12_4: U12.4 U28.25 | length 1110.1
  Top Layer w10: v1(3494.4,2844.4) 3494.4,2834.4 3706.7,2834.4 3754.4,2882.1 3754.4,2944.4 3779.4,2969.4 3804.4,2969.4 3839.4,2934.4 v1(3839.4,2884.4) ; v1(4149.4,2679.4) 4149.4,2668.8 4218.8,2668.8 U12.4@4218.81,2686.09
  Bottom Layer w10: U28.25@3489.56,2948.4 3489.56,2849.24 v1(3494.4,2844.4) ; v1(3839.4,2884.4) 4044.4,2679.4 v1(4149.4,2679.4)
U13_4: U13.4 U28.24 | length 1441.7
  Top Layer w10: v1(3519.4,2864.4) 3519.4,2854.4 3699.4,2854.4 3729.4,2884.4 3729.4,2959.4 v1(3754.4,2984.4) ; v1(4089.4,3534.4) 4174.4,3534.4 4174.4,3391.09 U13.4@4218.81,3391.09
  Bottom Layer w10: U28.24@3509.24,2948.03 3509.24,2864.4 v1(3519.4,2864.4) ; v1(3754.4,2984.4) 3824.4,3004.4 3859.4,3124.4 4089.4,3274.4 v1(4089.4,3534.4)
U17_4: U17.4 U28.28 | length 1627
  Top Layer w10: v1(3414.4,2824.4) 3414.4,2814.4 3709.4,2814.4 3789.4,2894.4 v1(3789.4,2944.4) ; v1(4114.4,3599.4) 4119.4,3694.4 4208.81,3708.81 U17.4@4208.81,3736.09
  Bottom Layer w10: v1(3414.4,2824.4) 3430.5,2840.5 U28.28@3430.5,2948.03 ; v1(3789.4,2944.4) 3854.4,3009.4 3854.4,3044.4 3874.4,3109.4 4114.4,3264.4 v1(4114.4,3599.4)
U28_1: R7.2 U28.1 | length 938.8
  Top Layer w10: v1(3127.4,2994.4) 3162.4,3029.4 3325,3029.4 3590,3294.4 3644.4,3294.4 3694.4,3344.4 v1(3769.4,3344.4)
  Bottom Layer w10: R7.2@3127.4,2919.4 v1(3127.4,2994.4) ; U28.1@3725.77,3322.04 3777.04,3322.04 3769.4,3329.68 v1(3769.4,3344.4)
U28_2: U28.2
U28_3: U28.3
U28_4: U28.4
U28_5: U28.5
U28_6: U28.6
U28_8: U28.8
U28_9: U28.9
U28_10: U28.10
U28_11: U28.11
U28_13: U3.2 U28.13 | length 4070.5
  Top Layer w10: v1(1654.4,4219.4) U3.2@1654.4,4286.09 ; v1(3254.4,4274.4) v1(3254.4,4329.4) ; v1(3309.4,3939.4) 3354.4,3909.4 3429.4,3909.4 3569.4,3769.4 3874.4,3769.4 3924.4,3719.4 v1(3924.4,3294.4) ; v1(3784.4,3079.4) 3809.4,3079.4 3809.4,3279.4 v1(3789.4,3279.4)
  Bottom Layer w10: v1(1654.4,4219.4) 1804.4,4069.4 1804.4,3904.4 1899.4,3904.4 2324.4,4329.4 v1(3254.4,4329.4) ; v1(3254.4,4274.4) 3279.4,4249.4 3294.4,4249.4 3309.4,4234.4 v1(3309.4,3939.4) ; U28.13@3725.77,3085.82 3784.4,3085.82 v1(3784.4,3079.4) ; v1(3789.4,3279.4) 3909.4,3279.4 v1(3924.4,3294.4)
U28_14: U28.14
U28_15: U28.15
U28_20: U28.20
U28_33: U28.33
U28_34: U28.34
U28_35: U28.35
U28_36: U28.36
U28_37: U28.37
U28_38: U28.38
U28_39: U28.39
U28_40: U28.40
U28_42: U28.42 | length 1356
  Top Layer w7: v1(2574.4,2829.4) 2574.4,2814.4 2592.27,2796.53 2607.31,2796.53
  Top Layer w10: v1(2640.03,3294.4) v1(2724.4,3294.4) ; v1(3070.03,3174.4) v1(3135.03,3174.4)
  Bottom Layer w6: v1(2724.4,3294.4) 2754.4,3264.4 2754.4,3244.4 2874.4,3124.4 3074.4,3124.4 3094.4,3144.4 3094.4,3164.4 3084.4,3174.4 v1(3070.03,3174.4)
  Bottom Layer w10: v1(2574.4,2829.4) 2574.4,3228.77 v1(2640.03,3294.4) ; v1(3135.03,3174.4) 3164.53,3203.9 U28.42@3273.03,3203.93
U28_43: pad.7 U28.43 | length 1399
  Top Layer w7: v1(3085.03,3204.4) 3125.02,3204.4 v1(3135.03,3214.4)
  Top Layer w10: v1(2569.4,2764.4) 2570.03,2765.03 2607.31,2765.03 ; v1(2635.03,3339.4) v1(2729.4,3339.4)
  Bottom Layer w6: v1(2815.03,3214.4) 3075.03,3214.4 v1(3085.03,3204.4)
  Bottom Layer w10: v1(2569.4,2764.4) 2549.4,2764.4 2549.4,3253.77 v1(2635.03,3339.4) ; v1(2729.4,3339.4) pad.7@2762.4,3306.4 2774.4,3294.4 2774.4,3255.03 v1(2815.03,3214.4) ; v1(3135.03,3214.4) 3135,3223.6 U28.43@3273.03,3223.61
U28_44: R32.1 U28.44 U32.4 | length 1658.8
  Top Layer w10: R32.1@2429.4,4001.4 2446.4,3984.4 v1(2564.4,3984.4) ; v1(2574.4,4139.4) 2574.8,4139 U32.4@2606.01,4139.01 U32.4@2606,4149 ; v1(2724.4,3584.4) 2739.4,3569.4 2824.4,3569.4 2919.4,3474.4 v1(3075.03,3474.4)
  Bottom Layer w10: v1(2574.4,4139.4) 2559.4,4124.4 2559.4,3984.4 v1(2564.4,3984.4) 2504.4,3924.4 2504.4,3804.4 v1(2724.4,3584.4) ; v1(3075.03,3474.4) 3129.4,3420.03 3129.4,3244.4 3130.5,3243.3 U28.44@3273.03,3243.3
U28_45: R31.2 U28.45 U32.1 | length 1540.6
  Top Layer w10: R31.2@2484.4,3917.4 2486.4,3919.4 v1(2539.4,3919.4) ; U32.1@2682.79,4149 2682.79,4106.01 v1(2684.4,4104.4) ; v1(2795.03,3624.4) 2930,3489.4 3040,3489.4 v1(3085.03,3504.4)
  Bottom Layer w10: v1(2684.4,4104.4) 2684.4,4064.4 v1(2539.4,3919.4) 2534.4,3914.4 2534.4,3799.4 2709.4,3624.4 v1(2795.03,3624.4) ; v1(3085.03,3504.4) 3149.4,3440.03 3149.4,3264.4 3150.82,3262.98 U28.45@3273.03,3262.98
U28_46: U28.46
U28_49: U28.49
U28_51: U28.51
U28_52: U28.52
U28_53: U28.53
U28_54: U28.54
U28_55: U28.55
U28_56: U28.56
U28_58: R5.2 U1.1 U28.58 | length 1176.2
  Top Layer w10: v1(3070.03,3394.4) 3150.03,3474.4 v1(3160.03,3474.4)
  Bottom Layer w10: U1.1@2861.25,3402 2861.25,3359.25 R5.2@2844.4,3342.4 2894.4,3342.4 2894.4,3274.4 2929.4,3239.4 3069.4,3239.4 3070.03,3240.03 v1(3070.03,3394.4) ; v1(3160.03,3474.4) 3160.03,3475.03 3219.4,3534.4 3514.4,3534.4 3534.4,3514.4 3534.4,3464.4 3528.9,3458.9 U28.58@3528.93,3400.77
U28_59: R6.2 U1.6 U28.59 | length 878.2
  Top Layer w10: v1(3054.4,3419.4) 3130.03,3495.03 v1(3130.03,3499.4)
  Bottom Layer w10: U1.6@2967.55,3402 2967.55,3359.25 R6.2@2979.4,3347.4 2982.4,3347.4 v1(3054.4,3419.4) ; v1(3130.03,3499.4) 3159.4,3499.4 3219.4,3559.4 3520,3559.4 3569.4,3510 3569.4,3468.8 3548.6,3448 U28.59@3548.61,3400.77
U28_60: U28.60
U28_61: U28.61
U28_62: U28.62
U31_3: 
U31_4: 
U31_5: 
U31_6: 
U31_9: 
U31_10: 
U31_11: 
U31_12: 
U31_15: 
U31_16: 
U31_17: 
U31_18: 
U31_19: 
U31_20: 
U31_21: pad.6 | length 58
  Top Layer w10: pad.6@2550.03,3034.4 2580.02,3034.4 2581.67,3032.75 2607.31,3032.75
U31_24: 
U31_25: 
U31_26: 
U31_27: 
U31_28: 
U31_29: 
U31_30: 
U31_31: 
U31_34: 
U31_37: 
U31_38: 
U31_39: 
U31_40: 
U31_41: 
U31_44: 
U31_45: 
U31_46: 
U31_47: 
U31_48: 
U31_49: 
U31_50: 
U31_54: 
U31_56: U2.1 | length 1196.4
  Top Layer w10: v1(2724.4,3534.4) 2724.4,3524.4 2770,3478.8 2770,2949.4 v1(2784.4,2949.4) ; 2728.56,2765.03 2778.77,2765.03 v1(2779.4,2764.4)
  Bottom Layer w10: U2.1@2469.4,3739.4 2504.4,3739.4 2609.4,3634.4 2624.4,3634.4 v1(2724.4,3534.4) ; v1@2785.03,2764.4 2790.03,2769.4 v1@2790.03,2949.4
U31_57: 
U31_58: 
U31_61: 
U31_62: 
U31_63: 
U31_64: 
U31_67: 
U31_68: 
U31_69: 
U31_70: 
U31_72: 
U31_73: 
U31_75: 
U31_76: 
U31_78: R26.1 R27.1 R28.1 R29.1 | length 2285.9
  Top Layer w10: 2728.56,2591.8 2771.8,2591.8 2855.02,2675.02 2855.02,3159.02 2870,3174 2870,3473.8 v1(2829.4,3514.4) ; v1(2890.03,3569.4) 2900,3569.4 2979.4,3648.8 v1(2979.4,3679.4) ; v1(3079.4,3679.4) 3109.4,3734.4 3113.1,3787.6 3125.03,3804.4 3129.4,4024.4 3154.4,4049.4 R29.1@3154.4,4081.4 R28.1@3229.4,4081.4 3229.4,4064.4 3314.4,3979.4 3439.4,3979.4 3449.4,3994.4 3449.4,3999.4 R26.1@3449.4,4076.4 R27.1@3514.4,4076.4
  Bottom Layer w10: v1(2829.4,3514.4) 2835.03,3514.4 v1(2890.03,3569.4) ; v1(2979.4,3679.4) v1(3079.4,3679.4)
U31_88: 
U31_89: U2.2 | length 1193
  Top Layer w7: v1(2514.4,2714.4) 2514.4,2639.4 2544.4,2609.4 2544.4,2504.4 2564.4,2484.4 2575.02,2484.4 2587.93,2497.31 2607.31,2497.31
  Top Layer w10: v1(2414.4,3464.4) 2414.4,3369.4 2514.4,3269.4 2514.4,2989.4 2479.5,2954.5 2479.3,2869.5 2514.4,2834.4 v1(2514.4,2714.4)
  Bottom Layer w10: v1(2414.4,3464.4) 2424.4,3464.4 U2.2@2469.4,3509.4
U31_90: 
U31_91: 
U31_92: 
U31_93: 
U31_94: 
U31_95: 
U31_96: 
U31_99: 
U31_100: 
U31_101: 
U31_102: 
U31_103: 
U31_104: 
U31_105: 
U31_106: 
U31_109: 
U31_110: 
U31_111: 
U31_112: 
U31_116: 
U31_118: 
U31_122: 
U31_124: 
U31_133: 
U31_135: 
U31_139: 
U31_141: 
U31_143: 
U31_144: 
U31_145: 
U31_146: 
U31_147: 
U31_148: 
U31_149: 
U31_151: 
U31_152: 
U31_153: 
U31_154: 
U31_157: 
U31_158: 
U31_159: 
U31_160: 
U31_163: 
U31_164: 
U31_165: 
U31_166: 
U31_169: 
U31_170: 
U31_171: 
U31_172: 
U31_175: 
U31_176: 
U31_177: 
U31_178: 
U31_181: 
U31_182: 
U31_183: 
U31_184: 
U31_187: 
U31_188: 
U31_189: 
U31_190: 
U31_193: 
U31_194: 
U31_195: 
U31_196: 
U31_199: 
U31_200: 
U32_6: R30.1 R32.2 U32.6 U33.2 U34.2 | length 2557.6
  Top Layer w10: U34.2@1721.5,2551.7 1723.7,2549.4 1794.4,2549.4 1809.4,2564.4 1809.4,2699.4 1722.4,2786.4 R30.1@1722.4,2899.4 1724.4,2901.4 v1(1724.4,2959.4) ; U33.2@1721.48,3576.65 1786.65,3576.65 v1(1789.4,3579.4) ; R32.2@2429.4,4067.4 2476.4,4067.4 v1(2509.4,4034.4) 2599.4,4004.4 2636.6,4009.4 2636.6,4021.6 U32.6@2631.6,4049.8
  Bottom Layer w10: v1(1724.4,2959.4) 1699.4,2959.4 1679.4,2979.4 1679.4,3559.4 1699.4,3579.4 v1(1789.4,3579.4) 1809.4,3579.4 1809.4,3614.4 2239.4,4044.4 2509.4,4044.4 v1(2509.4,4034.4)
U32_7: R30.2 R31.1 U32.7 U33.1 U34.1 | length 2849.2
  Top Layer w10: v1(1654.4,2959.4) 1654.4,2901.4 R30.2@1656.4,2899.4 1656.4,2817.4 1784.4,2689.4 1784.4,2604.4 1779.4,2599.4 1722.94,2599.4 U34.1@1721.48,2600.86 ; U33.1@1721.48,3625.86 1780.86,3625.86 v1(1784.4,3629.4) ; v1(2134.4,3989.4) 2369.4,3989.4 2449.4,3909.4 2449.4,3854.4 2452.4,3851.4 R31.1@2484.4,3849.4 ; R31.1@2484.4,3851.4 2487.4,3854.4 2544.4,3854.4 2574.4,3884.4 2574.4,3924.4 2624.4,3974.4 2659.4,3974.4 2662.2,3977.2 U32.7@2657.2,4049.8
  Bottom Layer w10: v1(1654.4,2959.4) 1654.4,3724.4 1764.4,3724.4 1784.4,3704.4 v1(1784.4,3629.4) 1784.4,3744.4 2029.4,3989.4 v1(2134.4,3989.4)
U33_3: U33.3
U33_4: U33.4
U34_3: U34.3
U34_4: U34.4
pads on no net: J3. U1.3 U4. U4.4 U12.1 U13.1 U17.1 U31. U33. U34.

## Silkscreen, mask and mechanical layers (free items; w line width, h text height)
Top Overlay:
  circle w10: c1711.34,1827.25 r49.21
  circle w10: c1662.13,3946.53 r49.21
  circle w10: c2689,3847.95 r49.21
  circle w10: c2689,1958.19 r49.21
  circle w10: c3988.36,1958.19 r49.21
  circle w10: c3988.21,3847.95 r49.21
  lines w10: 2603.86,2642.24 3056.62,2642.24 3056.62,3154.05 2603.86,3154.05 2603.86,2642.24 ; 3172.26,3495.03 3743.13,3495.03 3743.13,3888.73 3172.26,3888.73 3172.26,3495.03
Bottom Overlay:
  text "cam1" at 3796.28,4364.4 h80
  text "cam0" at 2951.28,4359.4 h80
  text "V3" at 3486.95,1841.85 h80

## Text inside footprints (layer, text, board x,y; h text height)
J3: Document "REF" at 2527.15,1546.28 h39.37
U31: Top Overlay "1" at 2585.65,3204.4 h20; Top Overlay "101" at 3915.65,3214.4 h20 r180; Top Overlay "WIFI AREA" at 3117.65,1907.4 h20 r180; Top Overlay "NO COPPER GND" at 3166.65,1954.4 h20 r180
U33: Document "REF" at 1546.28,3451.65 h39.37 r270
U34: Document "REF" at 1546.28,2426.65 h39.37 r270